# EAGLE board Baja Breakout (EAGLE 9.6.2)
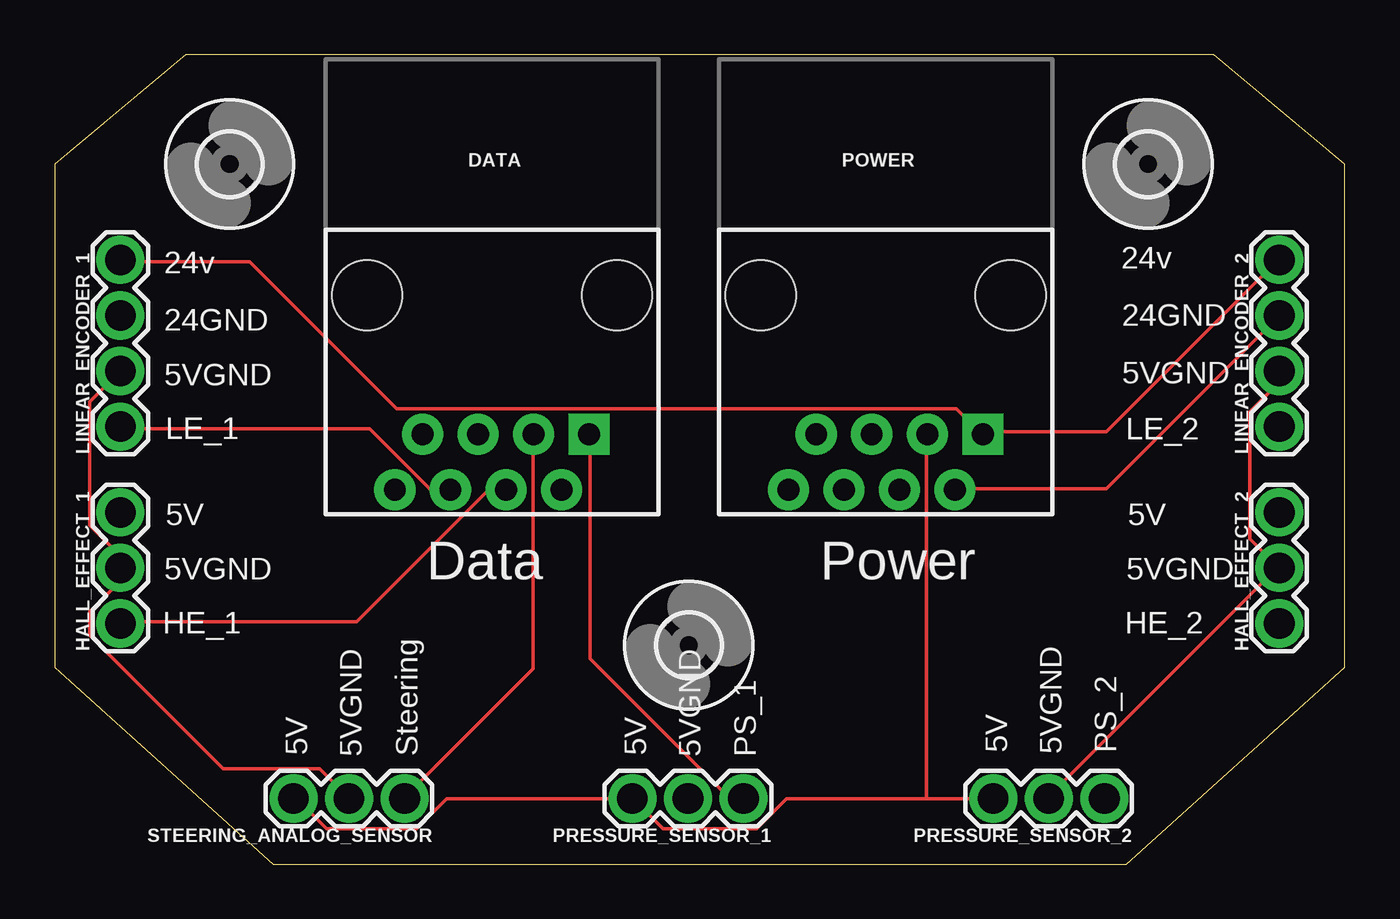
[diagram p0: board, top side]
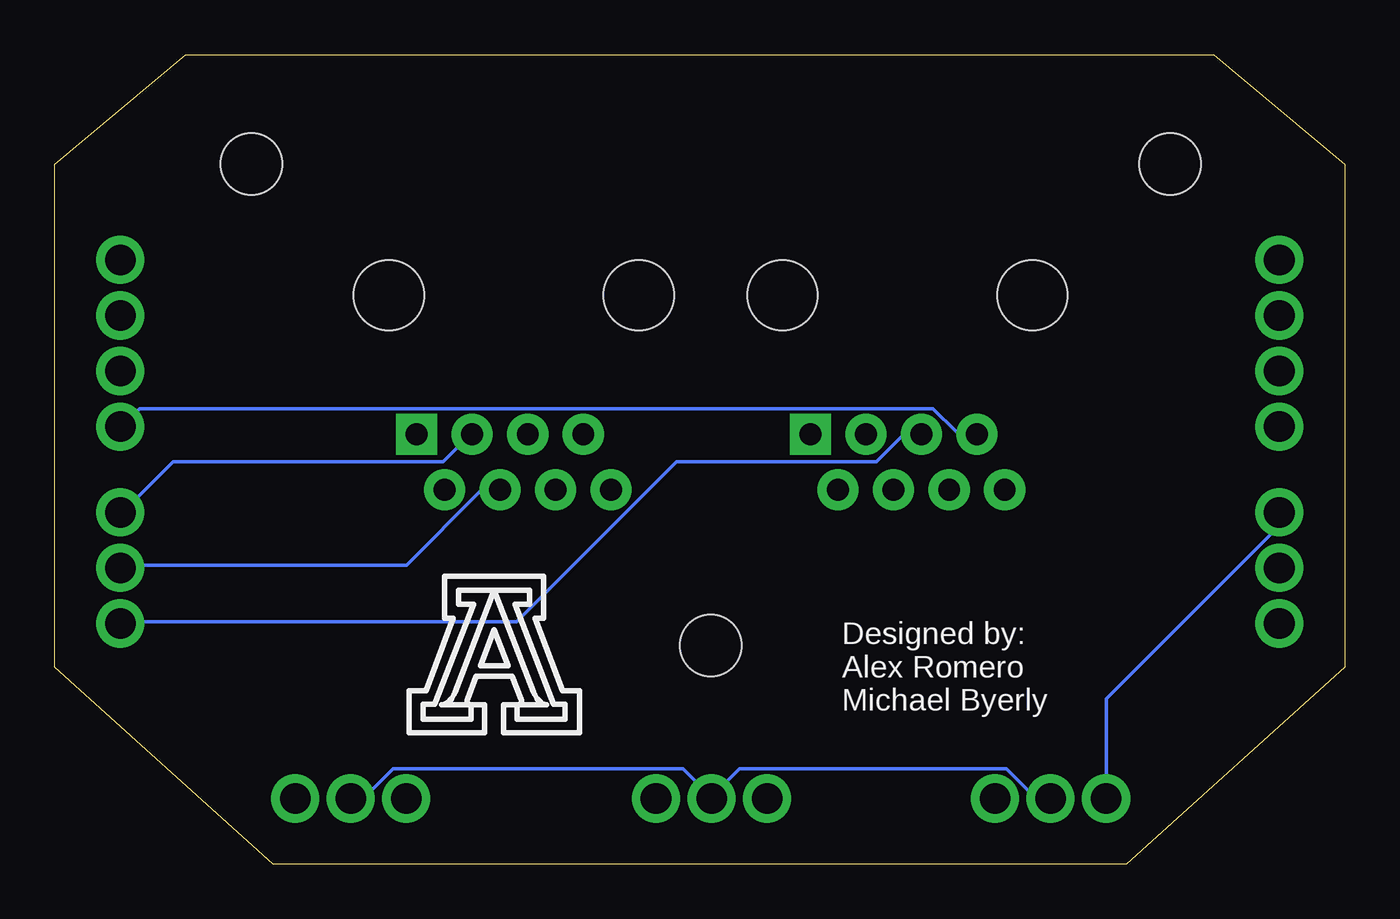
[diagram p1: board, bottom side, seen from below]

Size 59 x 37 mm. Coordinates in mm from the lower left corner, seen from the top.
Outline: 0,32 0,9 10,0 49,0 59,9 59,32 53,37 6,37 0,32
Copper layers (1*16): Top 0.035mm / dielectric 1.5mm / Bottom 0.035mm
Design rules "default": minimum track width 6mil, minimum drill 0.35mm, track to track 6mil, track to pad 6mil, pad to pad 6mil, via to via 6mil, smd to smd 6mil, copper to edge 40mil, drill to drill 6mil, minimum pad ring 10mil, minimum via ring 8mil, stop-mask expansion 4mil, vias tented up to drill 0mil, thermal gap 10mil

## Footprints (pad centres in the part's own frame; a part is rotated, then mirrored left to right if it is on the bottom)
RJ45-8 = drill 1 pad 1.88 square: 1 -4.445,6.35 | drill 1 pad 1.88: 2 -3.175,8.89; 3 -1.905,6.35; 4 -0.635,8.89; 5 0.635,6.35; 6 1.905,8.89; 7 3.175,6.35; 8 4.445,8.89 | hole 3.2: -5.715,0; 5.715,0
2,8 = hole 2.8: 0,0
1X03 = drill 1.4 pad 2.2: 1 0,0; 2 2.54,0; 3 5.08,0
1X04 = drill 1.4 pad 2.2: 1 0,0; 2 2.54,0; 3 5.08,0; 4 7.62,0

## Placement (x,y rotation side)
DATA  RJ45  [RJ45-8]  20,26 180 top
H1  MOUNT-HOLE2.8  [2,8]  8,32 0 top
H2  MOUNT-HOLE2.8  [2,8]  50,32 0 top
H4  MOUNT-HOLE2.8  [2,8]  29,10 0 top
HALL_EFFECT_1  [1X03]  3,11 90 top
HALL_EFFECT_2  [1X03]  56,11 90 top
LINEAR_ENCODER_1  [1X04]  3,20 90 top
LINEAR_ENCODER_2  [1X04]  56,20 90 top
POWER  RJ45  [RJ45-8]  38,26 180 top
PRESSURE_SENSOR_1  [1X03]  31.5,3 180 top
PRESSURE_SENSOR_2  [1X03]  48,3 180 top
STEERING_ANALOG_SENSOR  [1X03]  16,3 180 top

## Library data of the parts
DATA POWER = SparkFun-Connectors; PROD_ID: CONN-08506; SF_ID: PRT-00643
H1 H2 H4 = holes
HALL_EFFECT_1 HALL_EFFECT_2 PRESSURE_SENSOR_1 PRESSURE_SENSOR_2 STEERING_ANALOG_SENSOR = 3 pin through
LINEAR_ENCODER_1 LINEAR_ENCODER_2 = 4 pin through; PROD_ID: CONN-09696

## Nets
5V: HALL_EFFECT_1.3 HALL_EFFECT_2.3 POWER.3 PRESSURE_SENSOR_1.3 PRESSURE_SENSOR_2.3 STEERING_ANALOG_SENSOR.3
5VGND: HALL_EFFECT_1.2 HALL_EFFECT_2.2 LINEAR_ENCODER_1.2 LINEAR_ENCODER_2.2 POWER.4 PRESSURE_SENSOR_1.2 PRESSURE_SENSOR_2.2 STEERING_ANALOG_SENSOR.2
24GND: LINEAR_ENCODER_1.3
24V: LINEAR_ENCODER_1.4 LINEAR_ENCODER_2.4 POWER.1
24VGND: LINEAR_ENCODER_2.3 POWER.2
HALL_EFFECT_1: DATA.4 HALL_EFFECT_1.1
HALL_EFFECT_2: DATA.5 HALL_EFFECT_2.1
LINEAR_ENCODER_1: DATA.6 LINEAR_ENCODER_1.1
LINEAR_ENCODER_2: DATA.7 LINEAR_ENCODER_2.1
N$8: DATA.8
PRESSURE_SENSOR2: PRESSURE_SENSOR_2.1
PRESSURE_SENSOR_1: DATA.1 PRESSURE_SENSOR_1.1
PRESSURE_SENSOR_2: DATA.2
STEERING_ANALOG_SENSOR: DATA.3 STEERING_ANALOG_SENSOR.1

## Tracks (layer width: path | path; a pad name or v marks a point on that pad's centre or on a via)
5V
  Top 0.152: STEERING_ANALOG_SENSOR.3 11.06,2.99 12.43,1.62 16.55,1.62 17.92,2.99 26.3,2.99 PRESSURE_SENSOR_1.3 26.45,2.99 27.82,1.62 32.09,1.62 33.46,2.99 39.86,2.99 | 39.86,2.99 PRESSURE_SENSOR_2.3 | 39.86,2.99 39.86,19.6 POWER.3
  Bottom 0.152: POWER.3 40.02,19.6 41.24,18.38 53.58,18.38 55.87,16.1 HALL_EFFECT_2.3 | HALL_EFFECT_1.3 3.14,15.94 3.14,15.33 10.91,7.56 10.91,3.14 STEERING_ANALOG_SENSOR.3
5VGND
  Top 0.152: PRESSURE_SENSOR_2.2 45.5,3.14 55.87,13.5 HALL_EFFECT_2.2 55.87,13.66 54.65,14.88 54.65,20.67 55.87,21.89 55.87,22.5 LINEAR_ENCODER_2.2 | LINEAR_ENCODER_1.2 2.98,22.5 1.61,21.12 1.61,15.49 2.98,14.11 2.98,13.66 HALL_EFFECT_1.2 2.98,13.5 2.98,12.89 1.61,11.52 1.61,10.46 7.71,4.36 12.13,4.36 13.35,3.14 STEERING_ANALOG_SENSOR.2
  Bottom 0.152: POWER.4 38.65,17.01 39.56,17.01 42.91,13.66 55.87,13.66 HALL_EFFECT_2.2 | STEERING_ANALOG_SENSOR.2 13.5,3.14 14.26,3.14 15.48,4.36 27.67,4.36 28.89,3.14 PRESSURE_SENSOR_1.2 29.04,3.14 30.26,4.36 43.52,4.36 44.74,3.14 45.35,3.14 PRESSURE_SENSOR_2.2
24V
  Top 0.152: LINEAR_ENCODER_2.4 55.87,27.53 48.09,19.75 42.45,19.75 POWER.1 42.3,19.75 41.24,20.82 15.63,20.82 8.93,27.53 3.14,27.53 LINEAR_ENCODER_1.4
24VGND
  Top 0.152: POWER.2 41.24,17.16 48.09,17.16 55.87,24.94 LINEAR_ENCODER_2.3
HALL_EFFECT_1
  Top 0.152: DATA.4 20.51,17.01 19.75,17.01 13.8,11.07 3.14,11.07 HALL_EFFECT_1.1
HALL_EFFECT_2
  Bottom 0.152: DATA.5 19.44,19.6 20.2,19.6 21.42,18.38 30.57,18.38 37.88,11.07 55.87,11.07 HALL_EFFECT_2.1
LINEAR_ENCODER_1
  Top 0.152: DATA.6 18.07,17.16 17.16,17.16 14.41,19.91 3.14,19.91 LINEAR_ENCODER_1.1
LINEAR_ENCODER_2
  Bottom 0.152: DATA.7 16.85,19.75 17.77,19.75 18.83,20.82 55.1,20.82 55.87,20.06 LINEAR_ENCODER_2.1
PRESSURE_SENSOR_1
  Top 0.152: DATA.1 24.47,19.6 24.47,9.39 30.72,3.14 31.48,3.14 PRESSURE_SENSOR_1.1
STEERING_ANALOG_SENSOR
  Top 0.152: DATA.3 21.88,19.6 21.88,8.93 16.09,3.14 STEERING_ANALOG_SENSOR.1

## Text on the board
tNames: 24v | 24v | 24GND | 24GND | 5VGND | 5VGND | LE_1 | LE_2 | 5V | 5V | 5VGND | Data | Power | 5VGND | HE_1 | HE_2 | 5V | 5VGND | Steering | 5V | 5VGND | PS_1 | 5V | 5VGND | PS_2
bNames: Designed by: / Alex Romero / Michael Byerly